# EAGLE board L3DCube_X16_Daughterboard (EAGLE 7.2.0)
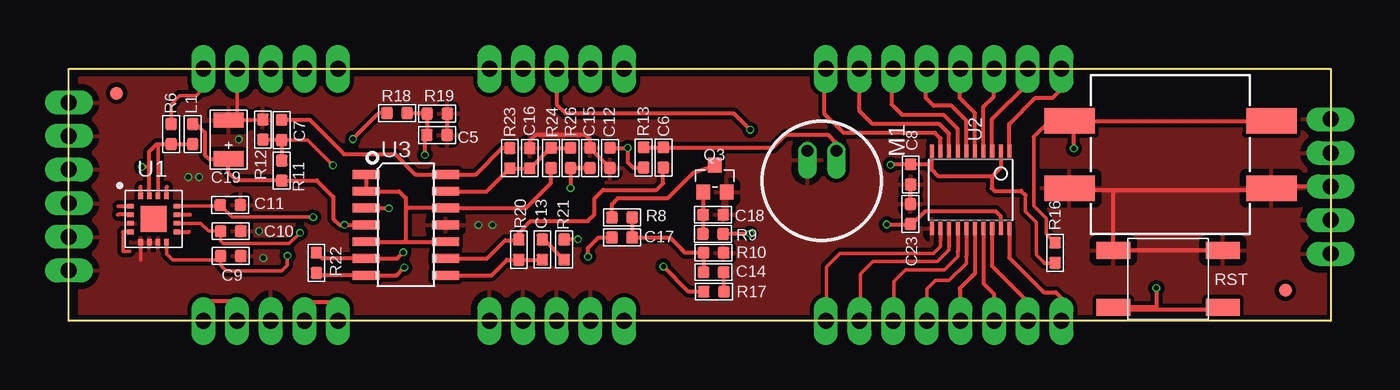
[diagram p0: board, top side]
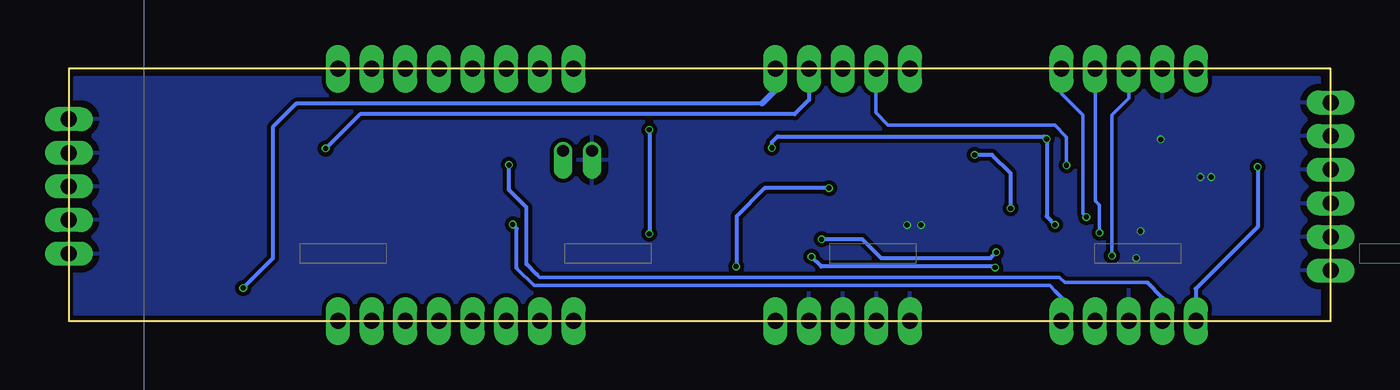
[diagram p1: board, bottom side, seen from below]

Size 95.25 x 19.05 mm. Coordinates in mm from the lower left corner, seen from the top.
Outline: 0,19.05 95.25,19.05 95.25,0 0,0 0,19.05
Copper layers (1*16): Top 0.035mm / dielectric 0.5mm / Bottom 0.035mm
Design rules "default *": minimum track width 10mil, minimum drill 15mil, track to track 8mil, track to pad 0mil, pad to pad 0mil, via to via 0mil, smd to smd 8mil, copper to edge 0mil, drill to drill 0mil, minimum pad ring 10mil, minimum via ring 0mil, stop-mask expansion 4mil, vias tented up to drill 0mil, thermal gap 20mil

## Footprints (pad centres in the part's own frame; a part is rotated, then mirrored left to right if it is on the bottom)
C0603 = smd 0.889 x 0.889: 1 -0.762,0; 2 0.762,0
AVX-B = smd 1.143 x 2.286: + -1.46,0; - 1.46,0
4P-12X12X6-SMD = smd 3.81 x 1.93: P$1 -7.62,2.54; P$2 -7.62,-2.54; P$3 7.62,-2.54; P$4 7.62,2.54
L0603 = smd 0.889 x 0.889: 1 -0.762,0; 2 0.762,0
MICROPHONE = drill 0.9 offset: GND 0,-1.1; IN 0,1.1
SOT23 = smd 1.016 x 1.143: 1 -0.889,-1.016; 2 0.889,-1.016; 3 0,1.016
R0603 = smd 0.889 x 0.889: 1 -0.762,0; 2 0.762,0
4P-SMD-6.0X6.0X5.0H = smd 2.54 x 1.27: 1 -4.129,2.159; 2 -4.129,-2.159; 3 4.129,-2.159; 4 4.129,2.159
ADXL335 = smd 0.5 x 0.35: COM1 -1.75,-0.325; NC1 -1.75,0.975; NC2 -1.75,-0.975; NC3 1.75,-0.975; NC4 1.75,0.325; ST -1.75,0.325; X 1.75,0.975; Y 1.75,-0.325 | smd 0.35 x 0.5: COM2 -0.975,-1.75; COM3 -0.325,-1.75; COM4 0.325,-1.75; NC5 0.975,1.75; NC6 -0.975,1.75; VSS1 0.325,1.75; VSS2 -0.325,1.75; Z 0.975,-1.75 | smd 1.95 x 1.95: P$17 0,0
TSSOP20 = smd 0.305 x 0.991: 1 -2.925,-2.918; 2 -2.275,-2.918; 3 -1.625,-2.918; 4 -0.975,-2.918; 5 -0.325,-2.918; 6 0.325,-2.918; 7 0.975,-2.918; 8 1.625,-2.918; 9 2.275,-2.918; 10 2.925,-2.918; 11 2.925,2.918; 12 2.275,2.918; 13 1.625,2.918; 14 0.975,2.918; 15 0.325,2.918; 16 -0.325,2.918; 17 -0.975,2.918; 18 -1.625,2.918; 19 -2.275,2.918; 20 -2.925,2.918
SOIC14 = smd 2.032 x 0.66: 1 -2.997,3.81; 2 -2.997,2.54; 3 -2.997,1.27; 4 -2.997,0; 5 -2.997,-1.27; 6 -2.997,-2.54; 7 -2.997,-3.81; 8 2.997,-3.81; 9 2.997,-2.54; 10 2.997,-1.27; 11 2.997,0; 12 2.997,1.27; 13 2.997,2.54; 14 2.997,3.81
CUBE-16-DAUGHTERBOARD = drill 1.2 long: 3V3 -66.04,-10.16; 3V3' -63.5,-10.16; 5V -58.42,-10.16; 5V' -55.88,-10.16; GAIN-CTR -39.37,8.89; GND0 -76.2,6.35; GND1 -76.2,3.81; GND2 -76.2,1.27; GND3 -76.2,-1.27; GND4 -76.2,-3.81; GND5 -76.2,-6.35; GND7 19.05,2.54; GND8 19.05,0; GND9 19.05,-2.54; GND10 19.05,-5.08; GND11 -60.96,-10.16; GND13 -63.5,8.89; GND14 -44.45,-10.16; GND15 -41.91,-10.16; GND16 -39.37,-10.16; GND17 -36.83,-10.16; IN0 -19.05,8.89; IN1 -16.51,8.89; IN2 -13.97,8.89; IN3 -11.43,8.89; IN4 -8.89,8.89; IN5 -6.35,8.89; IN6 -3.81,8.89; IN7 -1.27,8.89; MIC -34.29,-10.16; MODE -36.83,8.89; NC -44.45,8.89; OUT0 -19.05,-10.16; OUT1 -16.51,-10.16; OUT2 -13.97,-10.16; OUT3 -11.43,-10.16; OUT4 -8.89,-10.16; OUT5 -6.35,-10.16; OUT6 -3.81,-10.16; OUT7 -1.27,-10.16; P$37 19.05,5.08; RST -34.29,8.89; SOUND -41.91,8.89; STEAMING -66.04,8.89; XOUT -55.88,8.89; YOUT -58.42,8.89; ZOUT -60.96,8.89
FIDUCIAL-MARK = smd 1 x 1: P$1 0,0

## Placement (x,y rotation side)
C5  10uF  [C0603]  27.79,14.05 180 top
C6  100nF  [C0603]  44.88,12.35 270 top
C7  100nF  [C0603]  16.06,14.44 270 top
C8  100nF  [C0603]  63.55,11.07 90 top
C9  100nF  [C0603]  12.22,4.9 180 top
C10  100nF  [C0603]  12.22,6.78 180 top
C11  100nF  [C0603]  12.19,8.76 180 top
C12  100nF  [C0603]  40.86,12.32 270 top
C13  100nF  [C0603]  35.73,5.39 90 top
C14  220nF  [C0603]  48.67,3.69 0 top
C15  10nF  [C0603]  39.34,12.32 270 top
C16  680pF  [C0603]  34.8,12.29 270 top
C17  220nF  [C0603]  41.76,6.3 0 top
C18  100nF  [C0603]  48.64,8.03 180 top
C19  220uF  [AVX-B]  12.06,13.72 90 top
C23  100nF  [C0603]  63.53,8.08 270 top
K2  BUTTON-4P  [4P-12X12X6-SMD]  83.16,12.57 0 top
L1  2.2uH  [L0603]  9.35,14.12 270 top
M1  MICROPHONE  [MICROPHONE]  56.85,12.85 270 top
Q3  2N7002  [SOT23]  48.77,10.77 0 top
R6  10K  [R0603]  7.72,14.12 90 top
R8  33  [R0603]  41.76,7.82 0 top
R9  10K  [R0603]  48.62,6.57 180 top
R10  10K  [R0603]  48.67,5.16 180 top
R11  100K  [R0603]  16.07,11.36 270 top
R12  100K  [R0603]  14.64,14.46 270 top
R13  4.3K  [R0603]  43.39,12.35 270 top
R16  10K  [R0603]  74.45,5.16 90 top
R17  1K  [R0603]  48.69,2.21 180 top
R18  100K  [R0603]  24.77,15.7 180 top
R19  100K  [R0603]  27.8,15.67 180 top
R20  10K  [R0603]  33.97,5.38 270 top
R21  10K  [R0603]  37.39,5.39 90 top
R22  220K  [R0603]  18.69,4.39 270 top
R23  180K  [R0603]  33.28,12.3 90 top
R24  3.3M  [R0603]  36.41,12.32 270 top
R26  10K  [R0603]  37.87,12.32 90 top
RST  BUTTON-4P-3100010P1  [4P-SMD-6.0X6.0X5.0H]  82.98,3.18 0 top
U1  ADXL335  [ADXL335]  6.4,7.7 0 top
U2  [TSSOP20]  68.07,9.91 180 top
U3  LMV324IDR-1100030P1  [SOIC14]  25.44,7.26 0 top
U$1  CUBE-16-DAUGHTERBOARD  [CUBE-16-DAUGHTERBOARD]  76.2,10.16 0 top
U$2  FIDUCIAL-MARK  [FIDUCIAL-MARK]  3.61,17.2 0 top
U$3  FIDUCIAL-MARK  [FIDUCIAL-MARK]  91.85,2.31 0 top

## Library data of the parts
C5-C19 C23 K2 L1 M1 Q3 R6 R8-R13 R16-R24 R26 RST U1 U3 U$1-U$3 = OPL Eagle Library
U2 = adafruit

## Nets
!RST: RST.2 RST.3 U$1.RST
+3V3: C8.2 L1.2 R6.1 R16.1 U1.VSS1 U1.VSS2 U2.2 U2.10 U$1.3V3 U$1.3V3'
+5V: C23.2 U2.19 U$1.5V U$1.5V'
A2: U2.6 U$1.IN3
A3: U2.7 U$1.IN2
A4: U2.8 U$1.IN1
A5: U2.9 U$1.IN0
D0: U2.1 U$1.IN7
D1: U2.3 U$1.IN6
D2: U2.4 U$1.IN5
D3: U2.5 U$1.IN4
DIN_1: U2.20 U$1.OUT7
DIN_2: U2.18 U$1.OUT6
DIN_3: U2.17 U$1.OUT5
DIN_4: U2.16 U$1.OUT4
DIN_5: U2.15 U$1.OUT3
DIN_6: U2.14 U$1.OUT2
DIN_7: U2.13 U$1.OUT1
DIN_8: U2.12 U$1.OUT0
GAIN-CTR: R9.1 U$1.GAIN-CTR
GND [vcc]: C5.1 C8.1 C9.1 C10.1 C11.1 C12.2 C15.1 C16.1 C18.1 C19.- C23.1 K2.P$2 K2.P$3 M1.GND Q3.2 R10.1 R12.1 R19.1 RST.1 RST.4 U1.COM1 U1.COM2 U1.COM3 U1.COM4 U2.11 U3.11 U$1.GND0 U$1.GND1 U$1.GND2 U$1.GND3 U$1.GND4 U$1.GND5 U$1.GND7 U$1.GND8 U$1.GND9 U$1.GND10 U$1.GND11 U$1.GND13 U$1.GND14 U$1.GND15 U$1.GND16 U$1.GND17 U$1.P$37
MIC: C6.1 M1.IN R13.1
MODE: K2.P$1 K2.P$4 R16.2 U$1.MODE
N$32: C18.2 Q3.1 R9.2
N$66: Q3.3 R8.1
N$68: C14.2 R17.1
N$69: C15.2 R17.2 R26.1
N$70: C16.2 R23.1 R24.1 R26.2 U3.13
N$96: C5.2 R18.1 R19.2 U3.3
N$97: C6.2 R20.1 U3.9
N$98: C13.1 R20.2 U3.8
N$99: C13.2 R21.1
N$100: R21.2 R22.1 U3.6
N$101: C14.1 C17.2 R8.2 R10.2
N$102: C12.1 C19.+ L1.1 R11.2 R13.2 R18.2 U3.4
N$104: C7.1 R23.2 U3.14
N$106: C17.1 R22.2 U3.7
REF: R24.2 U3.1 U3.2 U3.5 U3.10 U3.12
SOUND: C7.2 R11.1 R12.2 U$1.SOUND
SWITCH: R6.2 U$1.STEAMING
XOUT: C11.2 U1.X U$1.XOUT
YOUT: C10.2 U1.Y U$1.YOUT
ZOUT: C9.2 U1.Z U$1.ZOUT

## Tracks (layer width: path | path; a pad name or v marks a point on that pad's centre or on a via)
!RST  (via drill 0.38)
  Top 0.305: v82.09,2.49 82.09,1.04 82.12,1.02 79.27,1.02 79.15,0.89 | 79.15,0.89 86.98,0.89 RST.3 | RST.2 79.02,1.02 79.15,0.89
  Bottom 0.305: 42.93,16.41 78.08,16.41 79.86,14.63 79.86,4.72 v82.09,2.49
  Bottom 0.406: U$1.RST 41.91,17.42 42.93,16.41
+3V3  (via drill 0.38)
  Top 0.254: U1.VSS2 6.08,11.6 6.05,11.63 | U1.VSS1 6.73,13.26 6.63,13.36 | 72.21,9.5 72.21,8.25 73.03,7.44 73.03,5 73.66,4.37
  Top 0.305: U2.2 70.35,11.6 69.67,10.92 | 69.67,10.92 65.66,10.92 65.15,11.43 65.15,11.91 | 65.15,11.91 U2.10 | 65.15,11.91 65.08,11.84 C8.2 62.08,11.84 v62.03,11.79 | 69.67,10.92 69.67,10.03 69.88,9.83 71.88,9.83 72.21,9.5 | 73.66,4.37 74.42,4.37 R16.1 | 10.16,0.89 U$1.3V3 10.16,1.5 10.19,1.52 12.7,1.52 U$1.3V3' | 6.05,11.63 v5.51,11.63 | U1.VSS2 6.08,12.81 6.63,13.36 R6.1 L1.2
  Bottom 0.254: 10.19,0.03 U$1.3V3 | 13.84,2.9 20.07,2.9 20.47,3.3 59.72,3.3 59.91,3.49
  Bottom 0.305: U$1.3V3' 12.7,1.75 13.84,2.9 | 59.91,3.49 60.71,4.29 60.71,8.58 62.03,9.91 v62.03,11.79 | v5.51,11.63 5.51,7.11 10.19,2.44 10.19,0.03
+5V  (via drill 0.38)
  Top 0.305: U2.19 70.35,7.91 69.95,8.31 64.64,8.31 63.65,7.31 C23.2 63.5,7.29 v61.75,7.29 | U$1.5V 17.78,1.45 17.81,1.42 20.32,1.42 U$1.5V'
  Bottom 0.254: 20.8,2.26 20.8,2.29 21.21,2.69 60.15,2.69 61.44,3.99
  Bottom 0.305: U$1.5V' 20.32,1.78 20.8,2.26 | 61.44,3.99 61.44,6.98 v61.75,7.29
A2
  Top 0.305: U2.6 67.75,15.13 66.62,16.26 65.28,16.26 64.69,16.84 64.69,18.97 U$1.IN3
A3
  Top 0.305: U2.7 67.1,14.51 66.04,15.57 62.92,15.57 62.13,16.36 62.13,18.95 U$1.IN2
A4
  Top 0.305: U2.8 66.45,14.15 65.71,14.88 60.66,14.88 59.69,15.85 U$1.IN1
A5
  Top 0.305: U2.9 65.8,13.78 65.38,14.2 58.5,14.2 57.05,15.65 57.05,18.95 U$1.IN0
D0
  Top 0.305: U2.1 71,14.89 72.97,16.87 74.27,16.87 74.93,17.53 U$1.IN7
D1
  Top 0.305: U2.3 69.7,15.24 72.39,17.93 U$1.IN6
D2
  Top 0.305: U2.4 69.05,16.19 69.82,16.97 69.82,19.02 U$1.IN5
D3
  Top 0.305: U2.5 68.4,15.7 67.26,16.84 67.26,19 U$1.IN4
DIN_1
  Top 0.305: U2.20 71,4.77 73.61,2.16 74.5,2.16 74.96,1.7 74.96,0.03 U$1.OUT7
DIN_2
  Top 0.305: U2.18 69.7,4.14 72.36,1.47 72.36,0.03 U$1.OUT6
DIN_3
  Top 0.305: U2.17 69.05,2.83 69.82,2.06 69.82,0.03 U$1.OUT5
DIN_4
  Top 0.305: U2.16 68.4,3.6 67.26,2.46 67.26,0.05 U$1.OUT4
DIN_5
  Top 0.254: 67.75,4.86 67.75,4.35 66.45,3.05 65.41,3.05 64.77,2.41 U$1.OUT3
  Top 0.305: U2.15 67.75,4.86 | 64.74,0.03 U$1.OUT3
DIN_6
  Top 0.254: 67.1,5.25 67.1,4.87 66.09,3.86 63.17,3.86 62.28,2.97 62.28,0.05
  Top 0.305: U2.14 67.1,5.25 | 62.28,0.05 U$1.OUT2
DIN_7
  Top 0.254: 66.45,5.66 66.45,5.36 65.58,4.5 60.68,4.5 59.74,3.56 59.74,0.05
  Top 0.305: U2.13 66.45,5.66 | 59.74,0.05 U$1.OUT1
DIN_8
  Top 0.254: 65.8,6.11 65.8,5.62 65.28,5.11 58.22,5.11 57.18,4.06 57.18,0.03
  Top 0.305: U2.12 65.8,6.11 | 57.18,0.03 U$1.OUT0
GAIN-CTR  (via drill 0.38)
  Top 0.305: U$1.GAIN-CTR 36.83,16.36 37.49,15.7 50.19,15.7 v51.44,14.45 | v51.44,6.58 R9.1
  Bottom 0.305: v51.44,14.45 v51.44,6.58
GND  (via drill 0.38)
  Top 0.254: C19.- 12.52,15.18 | 12.52,15.18 14.6,15.18 R12.1 | U$1.GND13 12.7,15.35 12.52,15.18 | U1.COM2 5.43,4.64 5.41,4.62
  Top 0.305: 90.4,9.85 K2.P$3 | U$1.GND8 90.7,10.16 90.4,9.85 | RST.4 RST.1 78.85,9.74 78.97,9.85 | C16.1 34.8,13.61 35.26,14.07 38.96,14.07 39.32,13.72 39.32,13.1 C15.1 39.34,13.07 C12.2 | R19.1 28.57,14.07 C5.1 | 90.4,9.85 78.97,9.85 | 78.97,9.85 75.72,9.85 K2.P$2 | C23.1 63.53,10.29 C8.1
  other vias: 9.02,10.87 9.83,10.87 14.68,4.75 14.35,6.78 12.83,13.72 30.91,7.24 31.98,7.24
  pour Top (isolate 0.305): 0.84,18.34 94.82,18.34 94.82,0.56 0.84,0.56
  pour Bottom (isolate 0.305): 0.84,18.34 94.82,18.34 94.82,0.56 0.84,0.56
MIC
  Top 0.305: R13.1 C6.1 53.17,13.12 54.13,14.07 57.3,14.07 57.89,13.49 57.89,12.91 M1.IN
MODE  (via drill 0.38)
  Top 0.254: 72.85,13.92 72.85,8.69 73.79,7.75 73.79,6.58 R16.2
  Top 0.305: K2.P$4 90.88,14.93 91.06,14.76 90.83,14.76 K2.P$4 | v75.87,13.03 75.87,14.78 K2.P$1 | K2.P$1 90.3,15.11 90.53,14.88 90.55,14.88 K2.P$4 | K2.P$1 74.04,15.11 72.85,13.92
  Bottom 0.305: U$1.MODE 39.37,16.71 40.46,15.62 73.28,15.62 v75.87,13.03
N$32
  Top 0.305: Q3.1 C18.2 47.88,6.59 R9.2
N$66
  Top 0.305: R8.1 41,8.81 41.45,9.27 45.21,9.27 47.14,11.2 Q3.3
N$68
  Top 0.305: C14.2 49.43,2.23 R17.1
N$69  (via drill 0.38)
  Top 0.305: R26.1 C15.2 38.23,11.56 37.87,11.2 v37.87,10.03 | 48.11,2.11 48.18,2.03 48.11,2.03 R17.2 46.79,2.21 v44.88,4.11
  Bottom 0.305: v37.87,10.03 42.72,10.03 44.83,7.92 44.83,4.17 v44.88,4.11
N$70
  Top 0.305: U3.13 31.55,9.8 R23.1 C16.2 36.35,13.08 R24.1 R26.2
N$75
  Top 0.254: 4.09,6.71 4.09,5.26 4.6,5.26
  Top 0.305: 4.67,6.71 4.09,6.71
N$76
  Top 0.305: 4.67,8.03 3.71,8.03
N$77
  Top 0.305: 4.65,8.66 3.73,8.66
N$78
  Top 0.305: 8.15,6.73 9.07,6.73
N$79
  Top 0.305: 8.15,8.03 9.14,8.03
N$80
  Top 0.305: 5.41,9.45 5.41,10.13
N$81
  Top 0.305: 7.39,9.45 7.39,10.13
N$96  (via drill 0.38)
  Top 0.305: R18.1 25.57,15.67 R19.2 27.04,14.07 C5.2 26.89,13.92 v26.87,12.55 | U3.3 24.14,8.53 v24.16,8.51
  Bottom 0.305: v24.16,8.51 24.16,11.15 25.55,12.55 v26.87,12.55
N$97
  Top 0.305: U3.9 31.56,4.72 32.94,6.1 33.92,6.1 R20.1 33.97,6.66 34.85,7.54 39.17,7.54 39.68,8.05 39.68,9.25 40.34,9.91 44.37,9.91 44.86,10.39 44.86,11.57 C6.2
N$98
  Top 0.305: U3.8 31.89,3.45 33.07,4.62 R20.2 C13.1
N$99
  Top 0.305: C13.2 35.87,6.15 R21.1
N$100  (via drill 0.38)
  Top 0.305: R22.1 19.13,4.72 U3.6 24.78,4.72 v25.25,5.18 25.21,5.15 | v38.43,6.17 37.41,6.17 R21.2
  Bottom 0.305: v38.43,6.17 35.36,6.17 33.93,4.75 25.68,4.75 v25.25,5.18
N$101
  Top 0.305: R8.2 C17.2 45.36,6.3 46.24,5.42 46.33,5.33 46.51,5.16 R10.2 47.9,3.76 C14.1
N$102  (via drill 0.38)
  Top 0.254: R11.2 16.09,10.62 | L1.1 9.63,14.88 | 12.03,12.22 C19.+
  Top 0.305: R11.2 12.67,10.6 12.04,11.23 12.04,12.23 C19.+ 12.03,12.29 | R18.2 23.4,15.7 v21.44,13.74 | U3.4 22.43,7.26 v20.8,7.26 20.42,7.26 19.96,7.72 19.96,9.37 18.72,10.62 16.09,10.62 | C12.1 v42.19,13.08 42.19,11.99 42.6,11.58 R13.2 43.63,11.64 | 9.63,14.88 10.26,14.25 10.26,12.55 10.59,12.22 12.03,12.22
  Bottom 0.305: v42.19,13.08 42.19,13.51 41.76,13.94 21.64,13.94 v21.44,13.74 21.44,7.9 v20.8,7.26
N$104
  Top 0.305: R23.2 32.72,13.06 30.73,11.07 U3.14 28.43,11.07 26.14,11.07 24.61,12.6 20.78,12.6 18.18,15.2 C7.1
N$106  (via drill 0.38)
  Top 0.305: R22.2 18.87,3.45 U3.7 24.73,3.45 v25.32,4.04 | v39.19,4.85 39.19,5.51 39.98,6.3 C17.1
  Bottom 0.305: v39.19,4.85 38.46,4.11 25.4,4.11 v25.32,4.04
REF
  Top 0.305: R24.2 36.4,10.41 34.51,8.53 U3.12 25.54,8.53 25.43,8.41 | U3.5 25.3,5.99 | 25.3,5.99 U3.10 | U3.1 U3.2 24.93,9.8 25.43,9.3 25.43,8.41 | 25.43,8.41 25.43,6.11 25.3,5.99
SOUND  (via drill 0.38)
  Top 0.254: C7.2 18.03,13.67 v19.94,11.76
  Top 0.305: R12.2 16.04,13.7 C7.2 R11.1
  Bottom 0.254: v19.94,11.76 19.94,13.89 20.83,14.78 33.4,14.78 34.34,15.72 34.34,19 U$1.SOUND
SWITCH
  Top 0.254: R6.2 7.72,16.36 8.38,17.02 9.6,17.02 10.21,17.63 10.21,19 U$1.STEAMING
XOUT  (via drill 0.38)
  Top 0.254: U1.X 11.34,8.67 C11.2 12.34,7.85 v18.44,7.85
  Bottom 0.254: U$1.XOUT 20.32,17.17 18.72,15.57 18.72,8.13 v18.44,7.85
YOUT  (via drill 0.38)
  Top 0.254: U1.Y 9.95,7.37 10.54,6.78 C10.2 11.46,6.04 11.66,5.84 16.64,5.84 v17.45,6.65
  Bottom 0.254: v17.45,6.65 17.45,8.76 17.75,9.07 17.75,19.02 U$1.YOUT
ZOUT  (via drill 0.38)
  Top 0.254: U1.Z 7.38,5.07 7.85,4.6 11.02,4.6 11.13,4.7 11.25,4.7 C9.2 11.46,4.19 11.86,3.78 16.08,3.78 16.48,4.19 16.48,4.9 v16.51,4.93
  Bottom 0.254: v16.51,4.93 16.51,15.54 15.21,16.84 15.21,19.02 U$1.ZOUT